# Altium PCB UPS.PcbDoc
Units mil, origin at the board's own origin, x right, y up, seen from the top; angles counter-clockwise.
Board outline 2559.06 x 2204.72 mil, 2 copper layers (Top Layer, Bottom Layer); 19 components, 10 nets, 72 pads, 2 vias.
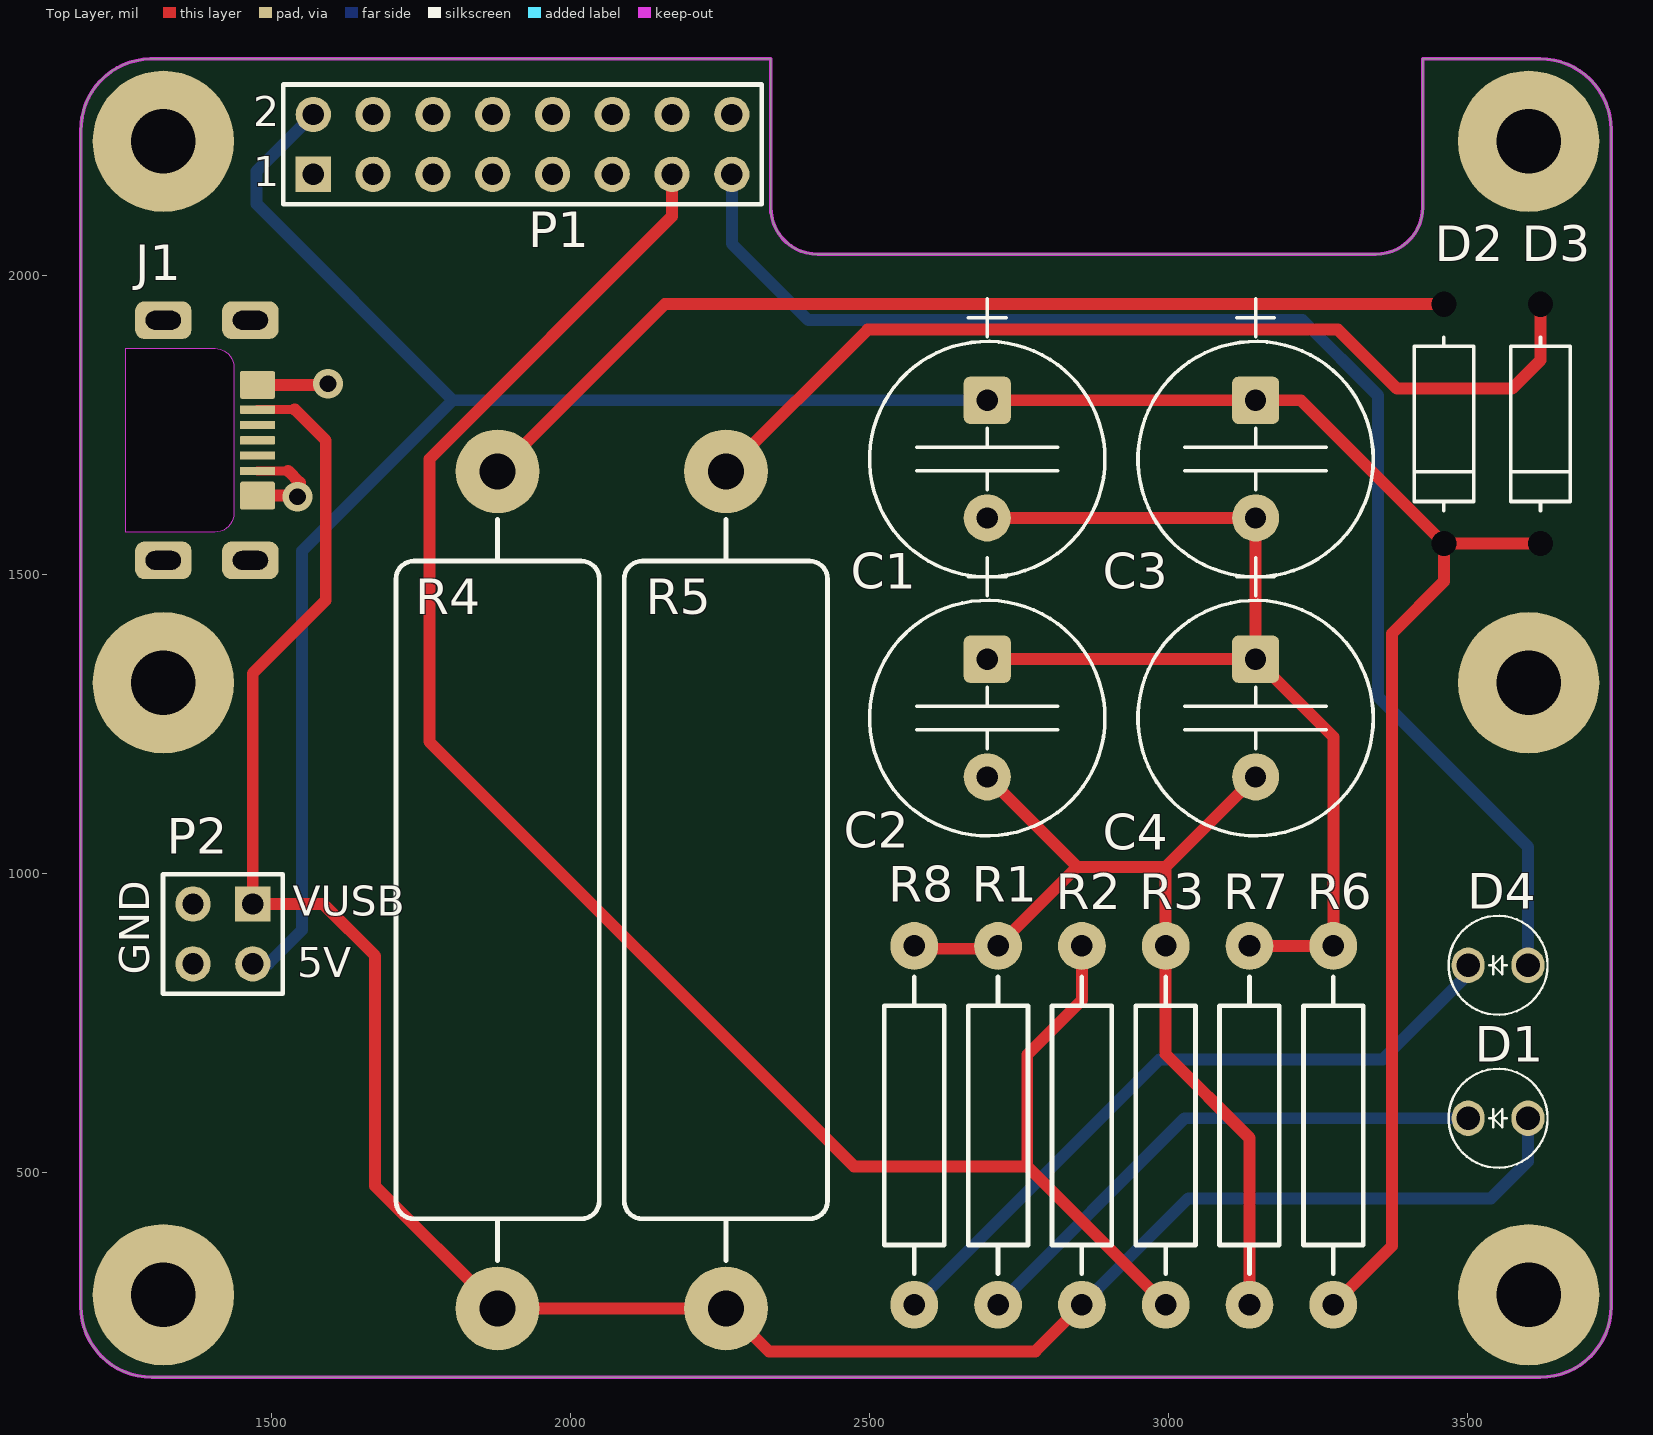
[diagram p0: Top Layer view]
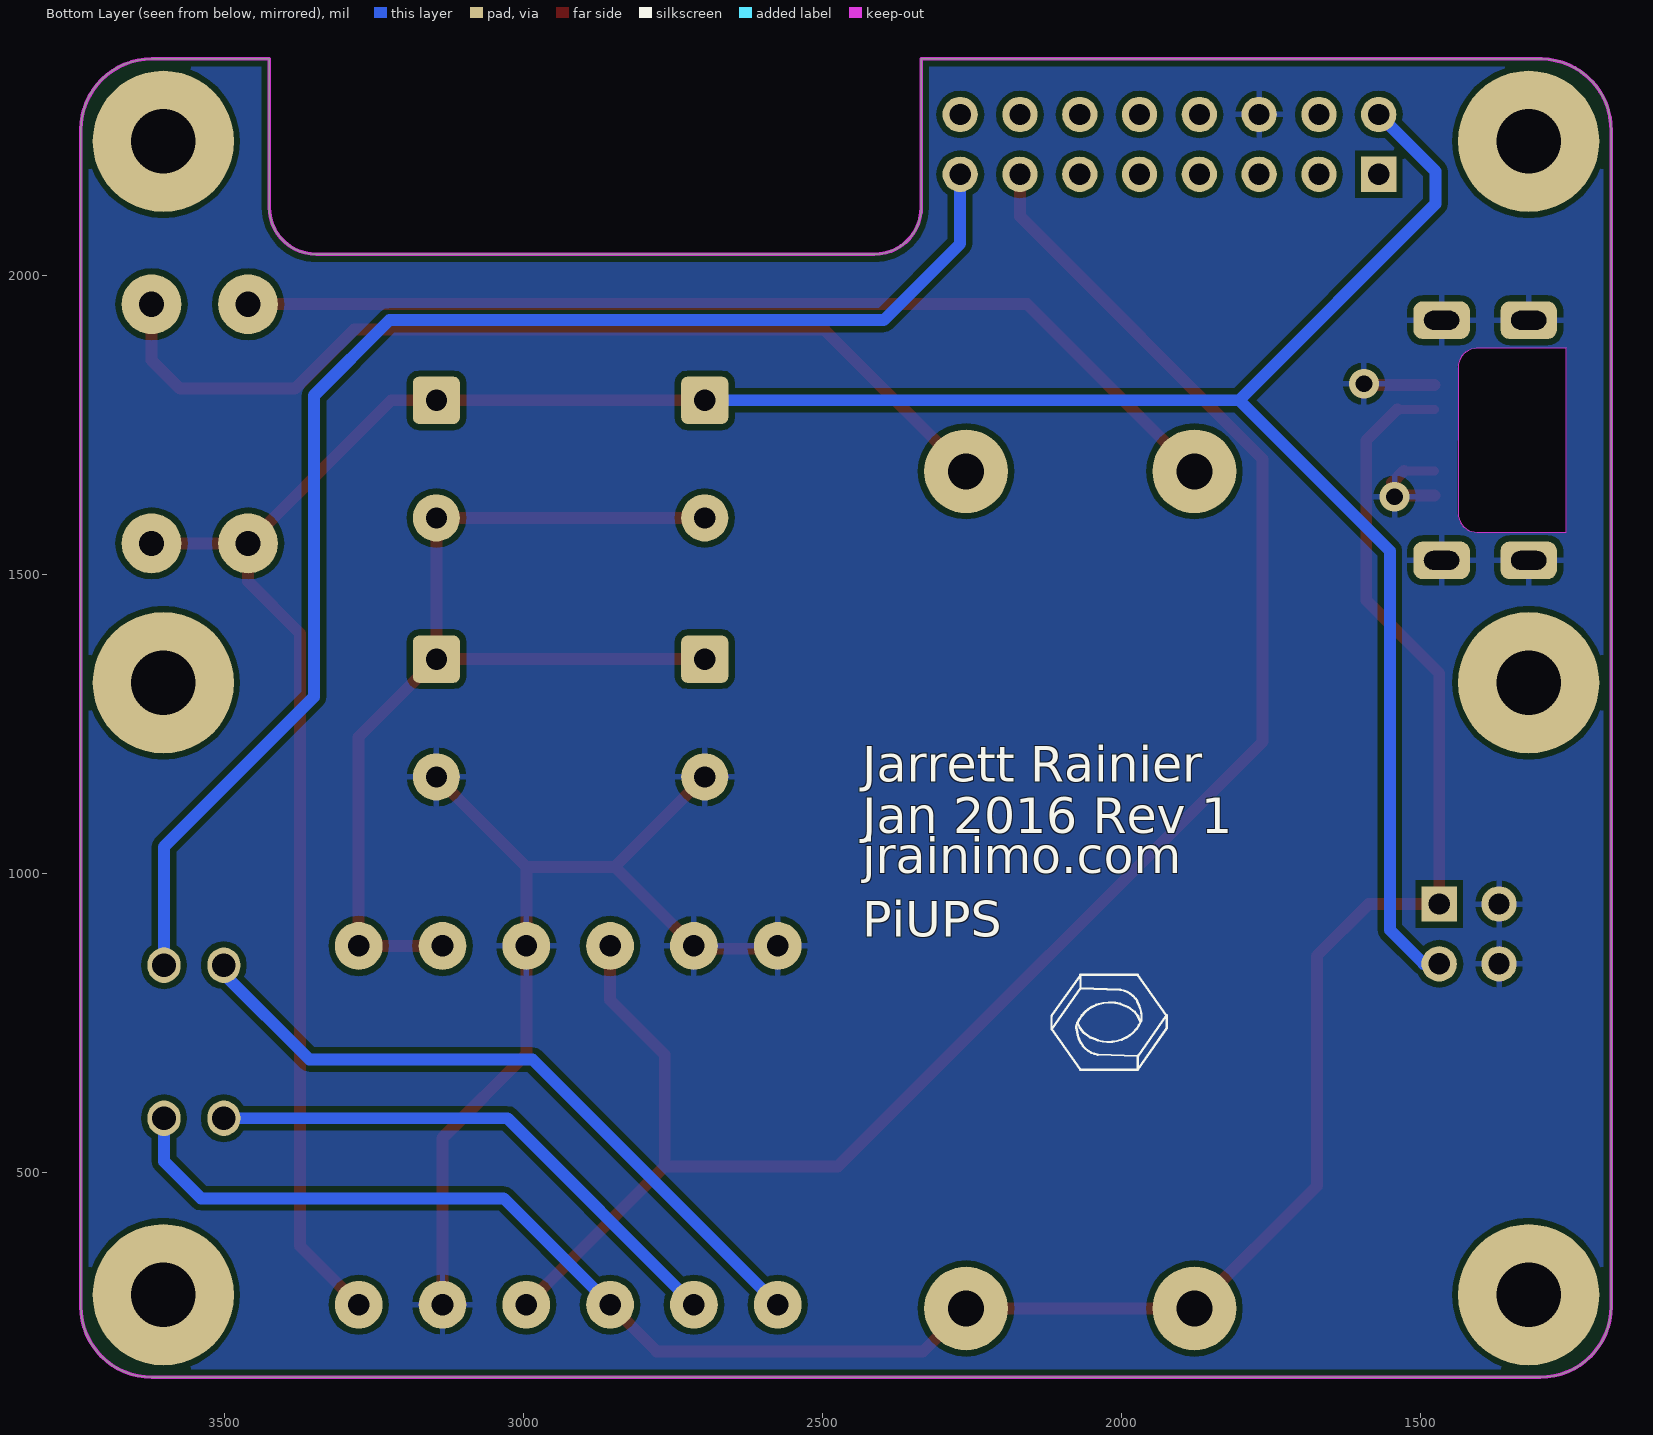
[diagram p1: Bottom Layer view, seen from below]
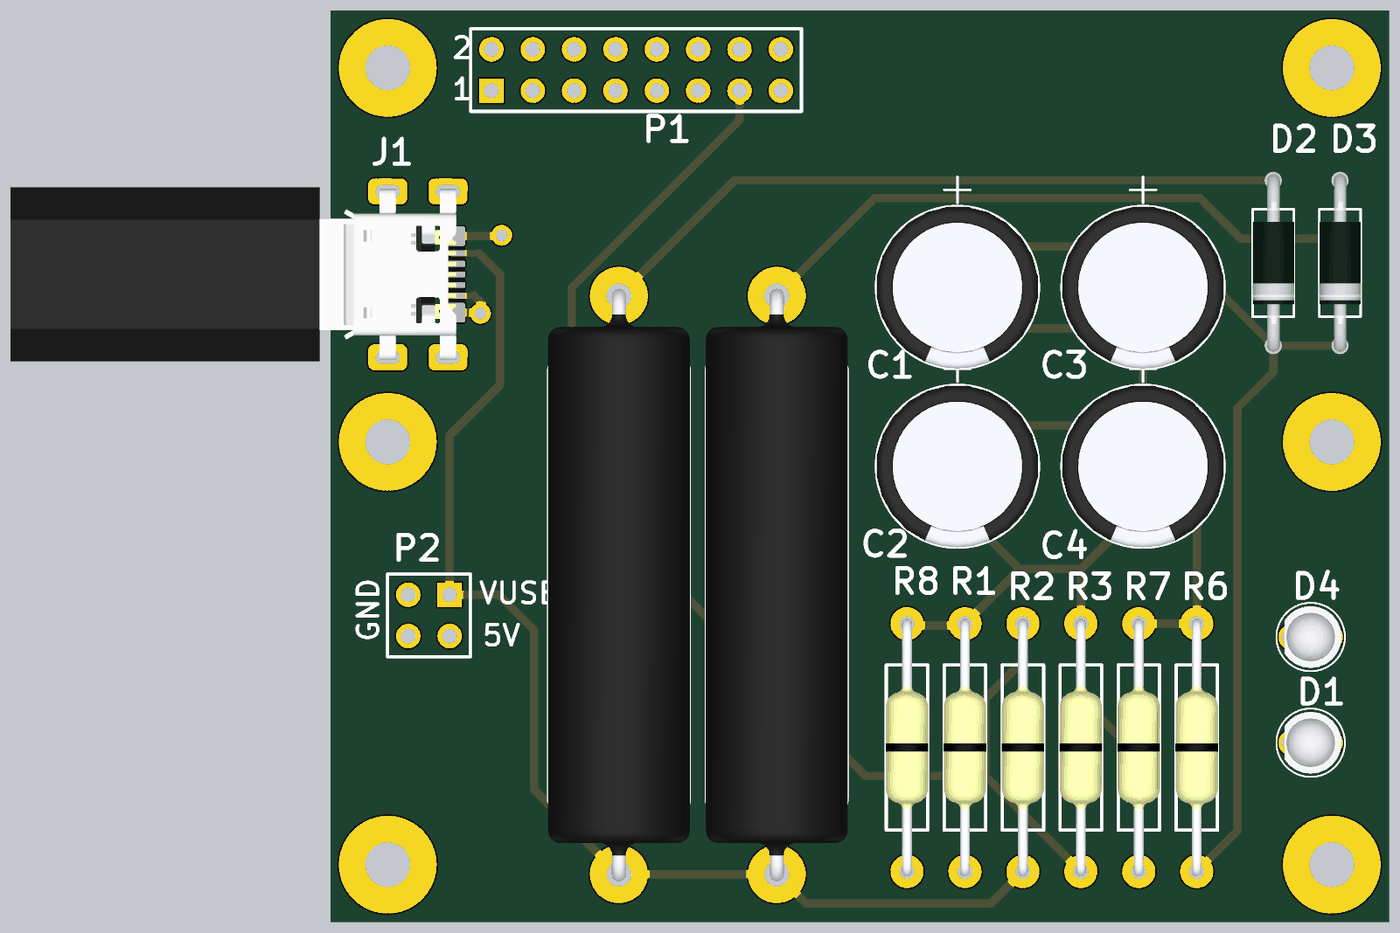
[diagram p2: 3D render of the assembled board from above, using the file's embedded part models]

## Layer stack, top to bottom
Top Layer: signal copper 1.4
Dielectric: dielectric 12.6, FR-4, Dk 4.8
Bottom Layer: signal copper 1.4

## Board outline
1181.1,275.59 1181.1,2241.68 1181.13,2241.68 cw(c1299.21,2244.09) 1296.8,2362.18 1296.8,2362.2 2334.65,2362.2 2334.65,2114.17 ccw(c2413.39,2114.17) 2413.39,2035.43 3346.46,2035.43 ccw(c3346.46,2114.17) 3425.2,2114.17 3425.2,2362.2 3622.05,2362.2 cw(c3622.05,2244.09) 3740.16,2244.09 3740.16,2244.51 3740.16,275.59 cw(c3622.05,275.59) 3622.05,157.48 1299.21,157.48 cw(c1299.21,275.59)

## Design rules (kind name [scope] priority, off if disabled: settings)
Clearance [All] p1: gap=10
PolygonConnect [All] p1: connectstyle=Relief reliefconductorwidth=10 reliefentries=4 polygonreliefangle="90 Angle"
RoutingVias [All] p1: holewidth=28 width=50 viastyle="Through Hole" minholewidth=28 minwidth=50 maxholewidth=28 maxwidth=50
SilkscreenOverComponentPads [All] p1: minsilkscreentomaskgap=10
SolderMaskExpansion [All] p1: expansion=4
Width [All] p1: maxlimit=100 minlimit=10 preferedwidth=10
27 further rules are at their usual default settings.

## Components (designator, comment, footprint, x,y, rotation, side; value= is the part's Value field where it differs from the comment)
C1 "Cap Pol1" CAPE5.0mm 2696.85,1692.91 r270 top
C2 "Cap Pol1" CAPE5.0mm 2696.85,1259.84 r270 top
C3 "Cap Pol1" CAPE5.0mm 3145.67,1692.91 r270 top
C4 "Cap Pol1" CAPE5.0mm 3145.67,1259.84 r270 top
D1 "RED" LED_3mm 3551.18,590.55 r0 top
D2 "Diode 1N4007" DO-41 3460.63,1751.97 r180 top
D3 "Diode 1N4007" DO-41 3622.05,1751.97 r180 top
D4 "GREEN" LED_3mm 3551.18,846.46 r0 top
J1 "MicroUSB" USB_Micro-B_FCI_SMD 1255.91,1724.41 r270 top
P1 "Header 8X2" HDR2X8 1569.68,2169.29 r0 top
P2 "Header 2X2" HDR2X2 1468.5,948.82 r180 top
R1 "Res3" RESTH_0.0R_AXIAL-0.6 2714.96,578.74 r90 top
R2 "Res3" RESTH_0.0R_AXIAL-0.6 2855.12,578.74 r90 top
R3 "Res3" RESTH_0.0R_AXIAL-0.6 2995.28,578.74 r90 top
R4 "Res3" RESTH_AXIAL_MRA-12 1877.95,972.44 r270 top
R5 "Res3" RESTH_AXIAL_MRA-12 2259.84,972.44 r270 top
R6 "Res3" RESTH_0.0R_AXIAL-0.6 3275.59,578.74 r90 top
R7 "Res3" RESTH_0.0R_AXIAL-0.6 3135.43,578.74 r270 top
R8 "Res3" RESTH_0.0R_AXIAL-0.6 2574.8,578.74 r90 top

## Footprints (in the part's own frame and the unit in brackets; to place one, negate y for a bottom-side part, rotate by r counter-clockwise, add the part's x,y. Pads: shape width x height; smd on the part's side, far side on the other; paste and mask are expansions set on the pad)
CAPE5.0mm [mm]
  rrect25% 2x2 hole 0.9: 1(-2.5,0)
  round 2 hole 0.9: 2(2.5,0)
  silkscreen extent -6.8,-5 5,5, body extent -4.96,-4.97 4.95,4.96, height 20
DO-41 [mil] "Diode, thru-hole"
  round 0 / inner round 0 / far side round 100 hole 42 unplated: A(0,-200) K(0,200)
  silkscreen extent -50,-145 50,145, body extent -51,-215 50,215, height 100
HDR2X2 [mm] "Connector; Header; 2x2 Position"
  rect 1.5x1.5 hole 0.9: 1(0,0)
  round 1.5 hole 0.9: 2(0,2.54) 3(2.54,0) 4(2.54,2.54)
  silkscreen extent -1.27,-1.27 3.81,3.81
HDR2X8 [mm] "Connector; Header; 8x2 Position"
  rect 1.5x1.5 hole 0.9: 1(0,0)
  round 1.5 hole 0.9: 2(0,2.54) 3(2.54,0) 4(2.54,2.54) 5(5.08,0) 6(5.08,2.54) 7(7.62,0) 8(7.62,2.54) 9(10.16,0) 10(10.16,2.54) 11(12.7,0) 12(12.7,2.54) 13(15.24,0) 14(15.24,2.54) 15(17.78,0) 16(17.78,2.54)
  silkscreen extent -1.27,-1.27 19.05,3.81
LED_3mm [mm]
  oval 1.4x1.5 hole 1: A(1.27,0) K(-1.27,0)
  silkscreen extent -2.1,-2.1 2.1,2.1, body extent -1.6,-1.9 1.9,1.9, height 5.5
RESTH_0.0R_AXIAL-0.6 [mil] "Axial Resistor 0 Ohm, Thru-Hole; 2 Leads; 0.6 in Pin Spacing"
  round 80 hole 36: 1(-300,0) 2(300,0)
  silkscreen extent -248,-50 248,50, body extent -312,-52 312,52, height 103
RESTH_AXIAL_MRA-12 [mil] "MRA-12 Axial Resistor Thru-Hole; 2 Leads"
  round 50 on Mech15: 0(0,0)
  round 140 hole 60: 1(-700,0) 2(700,0)
  silkscreen extent -620,-170 620,170, body extent -717,-171 717,171, height 342
USB_Micro-B_FCI_SMD [mm]
  round 0.508 on Mech15: 0(0,0)
  rrect20% 0.35x1.5 smd: 1(-1.3,5.6) 2(-0.65,5.6) 3(0,5.6) 4(0.65,5.6) 5(1.3,5.6)
  rrect50% 1.6x2.4 hole 0.8 slot 1.5 at 90 deg: SH(-5.1,5.3) SH(-5.1,1.6) SH(5.1,5.3) SH(5.1,1.6)
  rrect20% 1.2x1.5 smd: SH(-2.35,5.6) SH(2.35,5.6)
  Keep-Out Layer board cut-out: -3.9,0 -3.9,3.797 -3.839,4.103 -3.666,4.362 -3.406,4.536 -3.1,4.597 -3.1,4.597 3.1,4.597 3.406,4.536 3.666,4.362 3.839,4.103 3.9,3.797 3.9,3.797 3.9,0
  body extent -5.35,-21.58 5.35,5.8, height 4.67

## Part data
C1 C2 C3 C4: "Polarized Capacitor (Radial)"
D1 D4: library part LED0, "Typical INFRARED GaAs LED"
D2 D3: "1 Amp General Purpose Rectifier"
J1: "USB On-The-Go (OTG) Mini-B Receptacle, Right Angle, SMT, 0.80mm (.031\") Pitch, Solder Tabs with Back Cover, Recessed Type"
P1: "Header, 8-Pin, Dual row"
P2: "Header, 2-Pin, Dual row"
R1 R2 R3 R4 R5 R6 R7 R8: "Resistor"

## Free pads (board coordinates)
  round 236.22 hole 108.27: 0(1318.9,295.28) 0(1318.9,1318.9) 0(1318.9,2224.41) 0(3602.36,295.28) 0(3602.36,1318.9) 0(3602.36,2224.41)

## Via types
v1: diameter 50, hole 28, Top Layer to Bottom Layer, 2 vias

## Nets (pads, with @x,y where several pads share a name; then routed paths per layer and width w, separated by ;. In a path a pad name is that pad's centre, name@x,y a point inside that pad or via, vN(x,y) a via of type N, cw(c..) or ccw(c..) an arc to the next point about the centre after c; other vN are vias at no path point)
5V: C1.1 C3.1 D2.K D3.K P1.2 P2.2 R6.1 | length 5017.6
  Top Layer w20: C1.1 C3.1 3221.26,1791.34 D2.K ; R6.1 3374.02,377.17 3374.02,1401.57 3460.63,1488.19 D2.K ; D3.K D2.K
  Bottom Layer w20: P2.2 1494.49,848.82 1551.18,905.51 1551.18,1539.37 1803.15,1791.34 ; P1.2 1474.72,2174.33 1474.72,2119.76 1803.15,1791.34 ; C1.1 1803.15,1791.34
GND: C2.2 C4.2 J1.5 J1.SH P1.6 P2.3 P2.4 R1.2 R3.2 R7.2 R8.2 | length 1950.8
  Top Layer w15: J1.5 1527.56,1673.23
  Top Layer w20: J1.SH@1476.38,1631.89 v1@1545.28,1631.89 ; J1.SH@1476.38,1816.93 1592.52,1816.93 v1(1594.49,1818.9) ; 1527.56,1673.23 1547.24,1653.54 1547.24,1633.86 v1@1545.28,1631.89 ; v1(1543.3,1629.92) v1@1545.28,1631.89 ; R8.2@2614.17,874.02 R1.2@2718.11,874.02 ; C2.2 2847.24,1011.02 ; R1.2 2847.24,1011.02 ; R7.2 3135.43,557.48 2995.28,697.64 R3.2 2995.28,1011.02 ; C4.2 2995.28,1011.02 ; 2847.24,1011.02 2995.28,1011.02
  Bottom Layer w20: v1(1543.3,1629.92) v1@1547.24,1629.92
GPIO22: D4.A P1.15 | length 2358.7
  Bottom Layer w20: P1.15 2269.68,2053.15 2397.64,1925.2 3224.41,1925.2 3350.39,1799.21 3350.39,1295.28 3601.18,1044.49 D4.A
GPIO27: P1.13 R2.2 R3.1 | length 3144.9
  Top Layer w20: P1.13 2169.68,2098.82 1763.78,1692.91 1763.78,1220.47 2474.02,510.24 2763.78,510.24 ; R2.2 2855.12,788.19 2763.78,696.85 2763.78,510.24 ; R3.1 2763.78,510.24
NetC1_2: C1.2 C2.1 C3.2 C4.1 R6.2 R7.1 | length 1807.4
  Top Layer w20: C2.1 C4.1 ; C1.2 C3.2 C4.1 ; R7.1 R6.2 3275.59,1228.35 C4.1
NetD1_2: D1.K R1.1 | length 915.4
  Bottom Layer w20: R1.1 3026.77,590.55 D1.K
NetD2_1: D2.A R4.1 | length 1698.5
  Top Layer w20: R4.1 2157.48,1951.97 D2.A
NetD3_1: D3.A R5.1 | length 1614.4
  Top Layer w20: R5.1 2496.85,1909.45 3283.46,1909.45 3381.89,1811.02 3574.8,1811.02 3622.05,1858.27 D3.A
NetD4_2: D4.K R8.1 | length 1170.1
  Bottom Layer w20: R8.1 2985.04,688.98 3358.27,688.98 3501.18,831.89 D4.K
VUSB: D1.A J1.1 P2.1 R2.1 R4.2 R5.2 | length 3833.6
  Top Layer w15: J1.1 1538.39,1775.59
  Top Layer w20: 1538.39,1775.59 1538.88,1776.08 1590.55,1724.41 1590.55,1456.69 1468.5,1334.65 P2.1 1586.61,948.82 1673.23,862.2 1673.23,477.17 R4.2 R5.2 2331.5,200.79 2777.17,200.79 R2.1
  Bottom Layer w20: R2.1 3033.07,456.69 3539.37,456.69 3601.18,518.5 D1.A
pads on no net: J1.0 J1.2 J1.3 J1.4 P1.1 P1.3 P1.4 P1.5 P1.7 P1.8 P1.9 P1.10 P1.11 P1.12 P1.14 P1.16 R4.0 R5.0

## Polygon pours and split planes (outlines as drawn)
GND on Bottom Layer "Bottom Layer-No Net" (solid, pour order 2): 1185.02,352.79 1181.1,2200.79 1181.1,2259.84 1192.91,2299.21 1216.54,2326.77 1244.09,2350.39 1283.46,2362.2 2334.65,2362.2 2334.65,2098.43 2346.46,2070.87 2362.2,2051.18 2397.64,2035.43 3350.39,2035.43 3381.89,2043.31 3413.39,2066.93 3425.2,2098.43 3425.2,2362.2 3633.86,2362.2 3677.17,2350.39 3708.66,2322.83 3724.41,2303.15 3740.16,2251.97 3740.16,271.65 3732.28,228.35 3716.54,204.72 3700.79,188.98 3665.35,165.35 3614.17,157.48 1287.4,157.48 1259.84,165.35 1224.41,181.1 1200.79,212.6 1185.04,248.03

## Keep-outs
Keep-Out Layer:
  lines w5.91: 1181.1,2241.68 1181.1,275.59 ccw(c1299.21,275.59) 1299.21,157.48 3622.05,157.48 ccw(c3622.05,275.59) 3740.16,275.59 3740.16,2244.51 ; 1181.13,2241.68 cw(c1299.21,2244.09) 1296.8,2362.18 2334.65,2362.2 2334.65,2114.17 ccw(c2413.39,2114.17) 2413.39,2035.43 3346.46,2035.43 ccw(c3346.46,2114.17) 3425.2,2114.17 3425.2,2362.2 3622.05,2362.2 cw(c3622.05,2244.09) 3740.16,2244.09

## Silkscreen, mask and mechanical layers (free items; w line width, h text height)
Bottom Overlay:
  lines w3.94: 1924.94,762.2 1972.98,830.32 ; 1966.59,766 1968.08,772.56 1970.89,780.54 cw(c2008.19,766.08) 2002.08,805.61 ; 1966.77,755.77 1966.44,758.4 1966.49,762.84 1967.36,768.59 ; 1967.12,753.35 1967.54,752.32 ; 1967.3,752.7 ccw(c2018.83,774.77) 1999.63,722.1 ccw(c2021.79,782.87) 2039.38,720.62 ; 1968.11,751.8 1973.58,762.97 ; 1971.91,760.91 1977.93,768.57 1988.42,776.32 2002.07,781.84 ; 1972.33,672.75 1924.46,740.62 1924.46,762.68 1972.63,694.52 ; 1972.71,671.86 2068.61,671.86 2116.86,740.26 ; 1972.71,694.85 1972.99,694.85 1972.99,672.14 ; 1972.84,694.7 1972.91,694.7 ; 1972.84,830.6 2068.74,830.6 ; 1972.98,694.69 2039.34,697.13 ; 2002.11,805.33 2068.47,807.77 2116.51,740.26 ; 2039.37,696.85 ccw(c2033.26,736.38) 2070.56,721.92 ; 2041.72,780.1 cw(c2022.59,727.66) 2073.9,749.65 ; 2041.82,780.36 2030.47,783.37 2021.47,784.24 2010.31,783.61 2002.07,781.84 ; 2053.03,726.15 2063.52,733.9 2069.54,741.55 2073.61,750.58 ; 2059.24,730.52 2050.25,725.02 2039.3,720.89 ; 2068.02,808.36 2068.15,808.36 ; 2068.46,830.32 2068.46,807.61 2068.74,807.61 ; 2068.73,830.03 2116.6,762.16 ; 2072.62,728.4 2074.09,733.88 2074.96,739.62 ; 2073.38,729.9 2070.56,721.92 ; 2074.33,749.11 2074.83,747.34 2075.29,744.08 2075.31,740.66 ; 2116.89,739.21 2116.89,762.25 ; 2002.07,781.84 2002.15,781.57 2002.07,781.84 ; 2039.3,720.89 2039.38,720.62 ; 2039.3,720.89 2039.38,720.62 ; 2039.3,720.89 2039.38,720.62 ; 2039.3,720.89 2039.38,720.62 ; 2070.3,722.03 2070.56,721.92 ; 2070.3,722.03 2070.56,721.92 ; 2070.3,722.03 2070.56,721.92 ; 2070.3,722.03 2070.56,721.92
  text "Jarrett Rainier" at 2433.07,1153.54 h60
  text "Jan 2016 Rev 1" at 2433.07,1066.93 h60
  text "jrainimo.com" at 2433.07,1000.31 h60
  text "PiUPS" at 2433.07,893.7 h60

## Text inside footprints (layer, text, board x,y; h text height)
P1: Top Overlay "2" at 1469.68,2249.29 h50; Top Overlay "1" at 1469.68,2149.29 h50
P2: Top Overlay "GND" at 1295.28,830.71 h50 r90; Top Overlay "5V" at 1543.31,826.77 h50; Top Overlay "VUSB" at 1535.43,929.13 h50